# Altium PCB StepMotor_pcb.PcbDoc (part 1 of 2)
Units mm, origin at the board's own origin, x right, y up, seen from the top; angles counter-clockwise.
Board outline 118.92 x 65.15 mm, 2 copper layers (Top Layer, Bottom Layer); 184 components, 60 nets, 864 pads, 72 vias.
Unrouted connection lines stored in the file: 2.
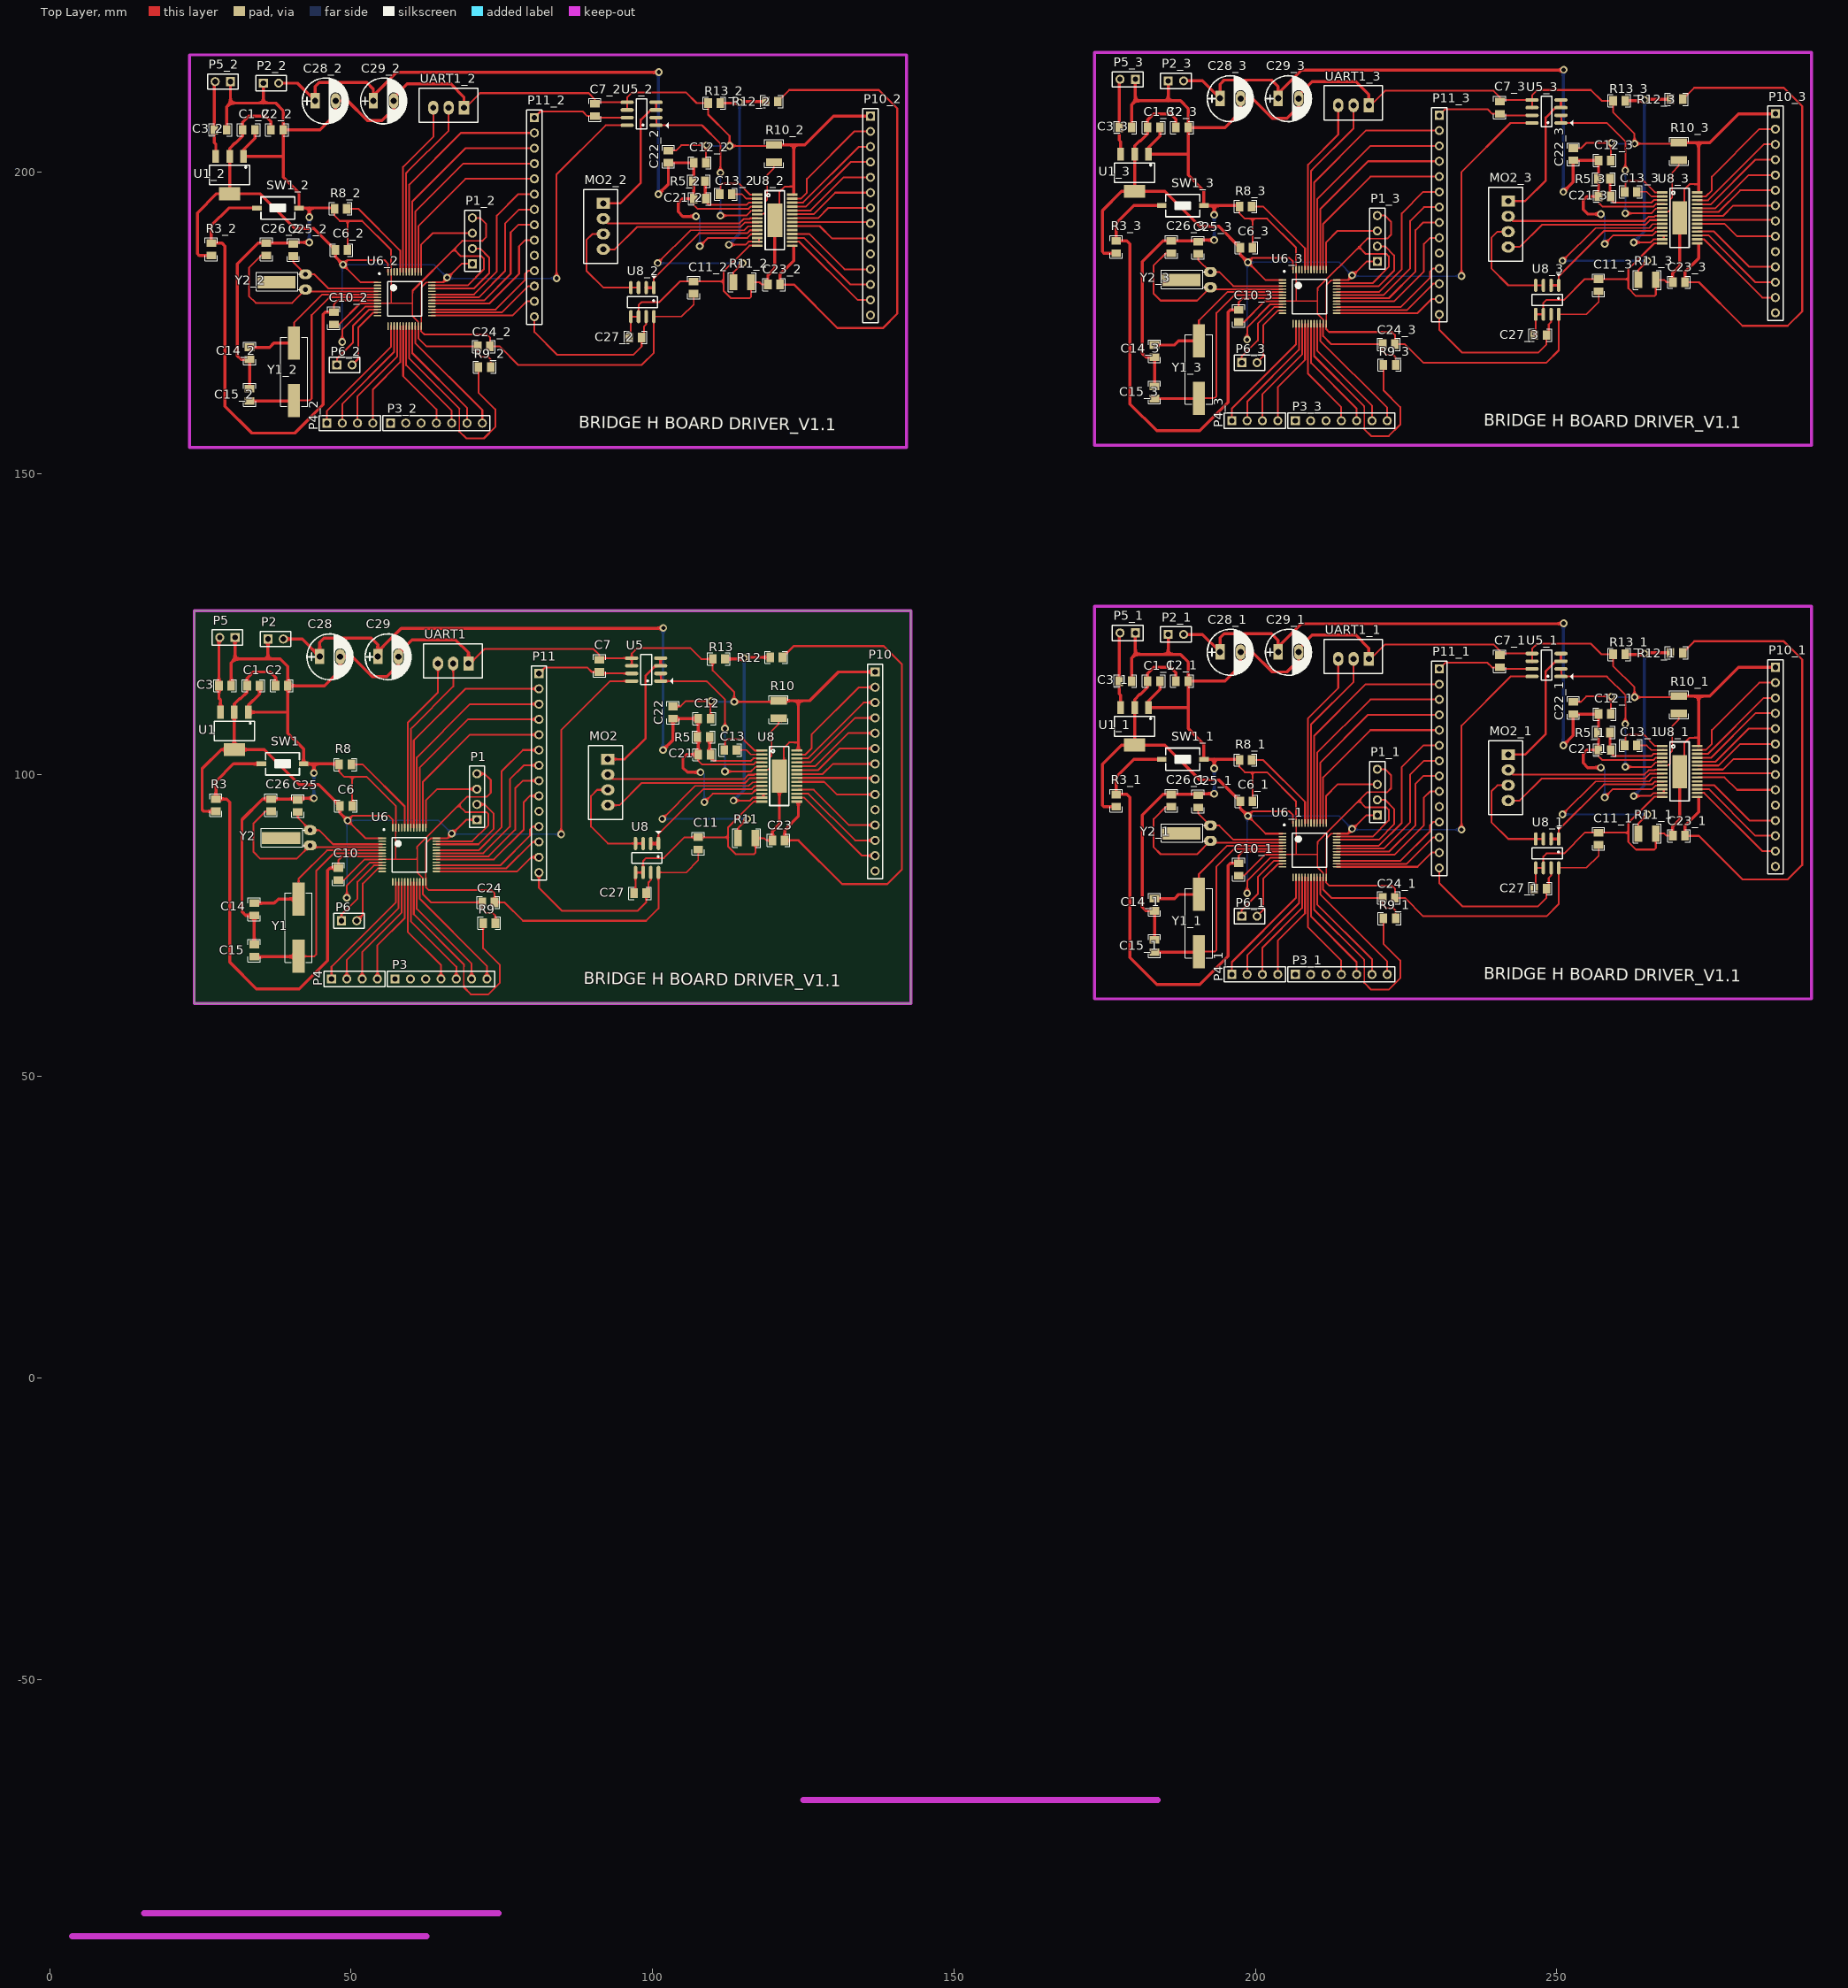
[diagram p0: Top Layer view]
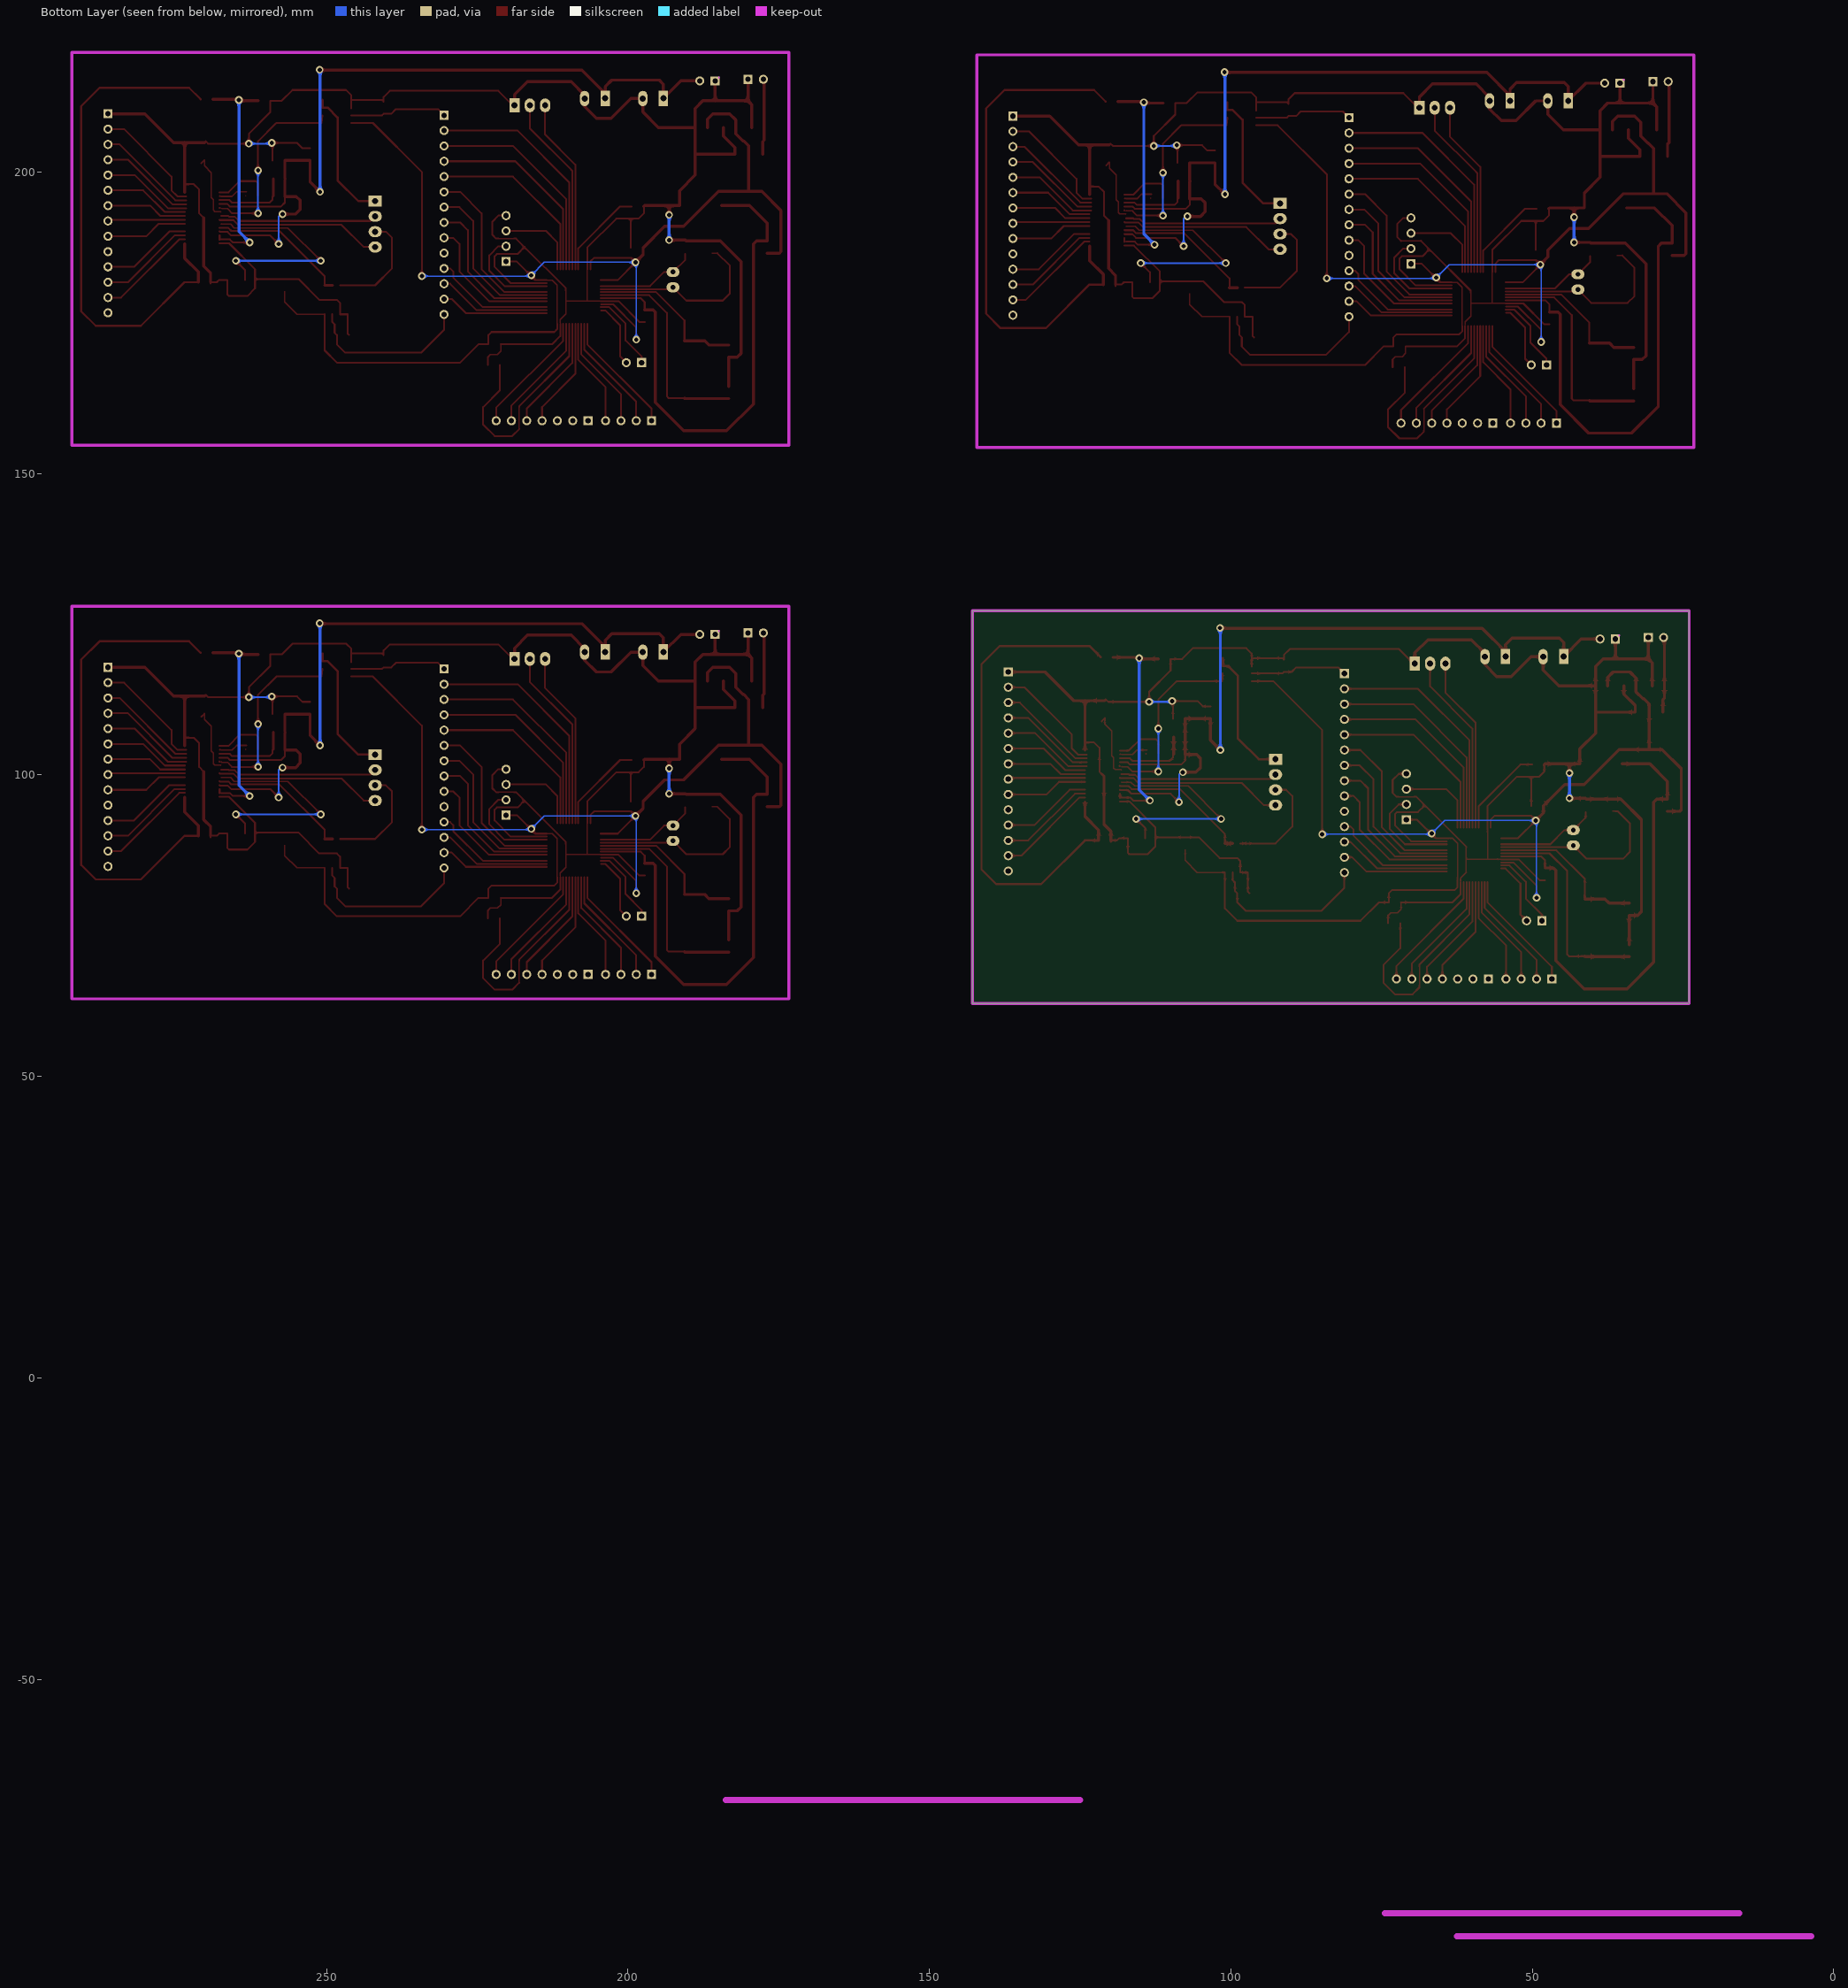
[diagram p1: Bottom Layer view, seen from below]

## Layer stack, top to bottom
Top Solder: solder mask 0.0102, Solder Resist, Dk 3.5
Top Layer: signal copper 0.0356
Dielectric1: dielectric 0.32, FR-4, Dk 4.8
Bottom Layer: signal copper 0.0356
Bottom Solder: solder mask 0.0102, Solder Resist, Dk 3.5

## Board outline
23.957,62.103 23.957,127.249 142.875,127.249 142.875,62.103

## Design rules (kind name [scope] priority, off if disabled: settings)
Clearance [All] p1: gap=0.254 ignorepadtopadclearanceinfootprint=FALSE except(0: Arc-Hole Track-Hole SMDPad-Hole THPad-Hole Via-Hole Fill-Hole Poly-Hole Region-Hole Text-Hole)
PolygonConnect [All] p1: connectstyle=Relief reliefconductorwidth=0.254 reliefentries=4 polygonreliefangle="90 Angle" airgapwidth=0.254
RoutingVias [All] p1: holewidth=0.711 width=1.27 viastyle="Through Hole" minholewidth=0.711 minwidth=1.27 maxholewidth=0.711 maxwidth=1.27
SolderMaskExpansion [All] p1: expansion=0.102
Width [All] p1: maxlimit=0.7 minlimit=0.2 preferedwidth=0.5
30 further rules are at their usual default settings.

## Classes and differential pairs
component class Stepmotor_schematic: C1 C2 C3 C6 C7 C10 C11 C12 C13 C14 C15 C21 C22 C23 C24 C25 C26 C27 C28 C29 MO2 P1 P2 P3 P4 P5 P10 P11 R3 R5 R8 R9 R10 R11 R12 R13 SW1 U1 U5 U6 U8 UART1 Y1 Y2

## Components (designator, comment, footprint, x,y, rotation, side; value= is the part's Value field where it differs from the comment)
C1 "105" 0805_HV 33.782,114.808 r180 top value=103
C1_1 "105" 0805_HV 183.134,115.57 r180 top value=103 (schematic designator C1)
C1_2 "105" 0805_HV 33.02,207.01 r180 top value=103 (schematic designator C1)
C1_3 "105" 0805_HV 183.134,207.391 r180 top value=103 (schematic designator C1)
C2 "105" 0805_HV 38.481,114.808 r180 top value=103
C2_1 "105" 0805_HV 187.833,115.57 r180 top value=103 (schematic designator C2)
C2_2 "105" 0805_HV 37.719,207.01 r180 top value=103 (schematic designator C2)
C2_3 "105" 0805_HV 187.833,207.391 r180 top value=103 (schematic designator C2)
C3 "105" 0805_HV 29.083,114.808 r180 top value=103
C3_1 "105" 0805_HV 178.435,115.57 r180 top value=103 (schematic designator C3)
C3_2 "105" 0805_HV 28.321,207.01 r180 top value=103 (schematic designator C3)
C3_3 "105" 0805_HV 178.435,207.391 r180 top value=103 (schematic designator C3)
C6 "104" 0805_HV 49.149,94.869 r180 top
C6_1 "104" 0805_HV 198.501,95.631 r180 top (schematic designator C6)
C6_2 "104" 0805_HV 48.387,187.071 r180 top (schematic designator C6)
C6_3 "104" 0805_HV 198.501,187.452 r180 top (schematic designator C6)
C7 "104" 0805_HV 91.186,118.11 r270 top
C7_1 "104" 0805_HV 240.538,118.872 r270 top (schematic designator C7)
C7_2 "104" 0805_HV 90.424,210.312 r270 top (schematic designator C7)
C7_3 "104" 0805_HV 240.538,210.693 r270 top (schematic designator C7)
C10 "104" 0805_HV 47.879,83.566 r90 top
C10_1 "104" 0805_HV 197.231,84.328 r90 top (schematic designator C10)
C10_2 "104" 0805_HV 47.117,175.768 r90 top (schematic designator C10)
C10_3 "104" 0805_HV 197.231,176.149 r90 top (schematic designator C10)
C11 "104" 0805_HV 107.569,88.646 r270 top
C11_1 "104" 0805_HV 256.921,89.408 r270 top (schematic designator C11)
C11_2 "104" 0805_HV 106.807,180.848 r270 top (schematic designator C11)
C11_3 "104" 0805_HV 256.921,181.229 r270 top (schematic designator C11)
C12 "103" 0805_HV 108.585,109.347 r180 top
C12_1 "103" 0805_HV 257.937,110.109 r180 top (schematic designator C12)
C12_2 "103" 0805_HV 107.823,201.549 r180 top (schematic designator C12)
C12_3 "103" 0805_HV 257.937,201.93 r180 top (schematic designator C12)
C13 "103" 0805_HV 112.903,104.14 r180 top
C13_1 "103" 0805_HV 262.255,104.902 r180 top (schematic designator C13)
C13_2 "103" 0805_HV 112.141,196.342 r180 top (schematic designator C13)
C13_3 "103" 0805_HV 262.255,196.723 r180 top (schematic designator C13)
C14 "22p" 0805_HV 33.909,77.724 r90 top value=103
C14_1 "22p" 0805_HV 183.261,78.486 r90 top value=103 (schematic designator C14)
C14_2 "22p" 0805_HV 33.147,169.926 r90 top value=103 (schematic designator C14)
C14_3 "22p" 0805_HV 183.261,170.307 r90 top value=103 (schematic designator C14)
C15 "22p" 0805_HV 33.909,70.866 r270 top value=103
C15_1 "22p" 0805_HV 183.261,71.628 r270 top value=103 (schematic designator C15)
C15_2 "22p" 0805_HV 33.147,163.068 r270 top value=103 (schematic designator C15)
C15_3 "22p" 0805_HV 183.261,163.449 r270 top value=103 (schematic designator C15)
C21 "0.1uF" 0805_HV 108.585,103.378 r180 top
C21_1 "0.1uF" 0805_HV 257.937,104.14 r180 top (schematic designator C21)
C21_2 "0.1uF" 0805_HV 107.823,195.58 r180 top (schematic designator C21)
C21_3 "0.1uF" 0805_HV 257.937,195.961 r180 top (schematic designator C21)
C22 "103" 0805_HV 103.378,110.363 r270 top
C22_1 "103" 0805_HV 252.73,111.125 r270 top (schematic designator C22)
C22_2 "103" 0805_HV 102.616,202.565 r270 top (schematic designator C22)
C22_3 "103" 0805_HV 252.73,202.946 r270 top (schematic designator C22)
C23 "0.47uF" 0805_HV 120.904,89.154 r0 top
C23_1 "0.47uF" 0805_HV 270.256,89.916 r0 top (schematic designator C23)
C23_2 "0.47uF" 0805_HV 120.142,181.356 r0 top (schematic designator C23)
C23_3 "0.47uF" 0805_HV 270.256,181.737 r0 top (schematic designator C23)
C24 "104" 0805_HV 72.771,78.867 r0 top
C24_1 "104" 0805_HV 222.123,79.629 r0 top (schematic designator C24)
C24_2 "104" 0805_HV 72.009,171.069 r0 top (schematic designator C24)
C24_3 "104" 0805_HV 222.123,171.45 r0 top (schematic designator C24)
C25 "12p" 0805_HV 41.148,94.869 r270 top value=103
C25_1 "12p" 0805_HV 190.5,95.631 r270 top value=103 (schematic designator C25)
C25_2 "12p" 0805_HV 40.386,187.071 r270 top value=103 (schematic designator C25)
C25_3 "12p" 0805_HV 190.5,187.452 r270 top value=103 (schematic designator C25)
C26 "12p" 0805_HV 36.703,94.996 r270 top value=103
C26_1 "12p" 0805_HV 186.055,95.758 r270 top value=103 (schematic designator C26)
C26_2 "12p" 0805_HV 35.941,187.198 r270 top value=103 (schematic designator C26)
C26_3 "12p" 0805_HV 186.055,187.579 r270 top value=103 (schematic designator C26)
C27 "104" 0805_HV 97.917,80.391 r0 top
C27_1 "104" 0805_HV 247.269,81.153 r0 top (schematic designator C27)
C27_2 "104" 0805_HV 97.155,172.593 r0 top (schematic designator C27)
C27_3 "104" 0805_HV 247.269,172.974 r0 top (schematic designator C27)
C28 "390uF" CP1/3.0 46.482,119.634 r0 top
C28_1 "390uF" CP1/3.0 195.834,120.396 r0 top (schematic designator C28)
C28_2 "390uF" CP1/3.0 45.72,211.836 r0 top (schematic designator C28)
C28_3 "390uF" CP1/3.0 195.834,212.217 r0 top (schematic designator C28)
C29 "390uF" CP1/3.0 56.134,119.634 r0 top
C29_1 "390uF" CP1/3.0 205.486,120.396 r0 top (schematic designator C29)
C29_2 "390uF" CP1/3.0 55.372,211.836 r0 top (schematic designator C29)
C29_3 "390uF" CP1/3.0 205.486,212.217 r0 top (schematic designator C29)
MO2 "Header 4_MH" "HEADER 4" 92.583,98.806 r270 top
MO2_1 "Header 4_MH" "HEADER 4" 241.935,99.568 r270 top (schematic designator MO2)
MO2_2 "Header 4_MH" "HEADER 4" 91.821,191.008 r270 top (schematic designator MO2)
MO2_3 "Header 4_MH" "HEADER 4" 241.935,191.389 r270 top (schematic designator MO2)
P1 "PRO01" HDR1X4 70.866,92.583 r90 top
P1_1 "PRO01" HDR1X4 220.218,93.345 r90 top (schematic designator P1)
P1_2 "PRO01" HDR1X4 70.104,184.785 r90 top (schematic designator P1)
P1_3 "PRO01" HDR1X4 220.218,185.166 r90 top (schematic designator P1)
P2 "Power" HDR1X2 36.195,122.555 r0 top
P2_1 "Power" HDR1X2 185.547,123.317 r0 top (schematic designator P2)
P2_2 "Power" HDR1X2 35.433,214.757 r0 top (schematic designator P2)
P2_3 "Power" HDR1X2 185.547,215.138 r0 top (schematic designator P2)
P3 "GPIO" HDR1X7 57.277,66.167 r0 top
P3_1 "GPIO" HDR1X7 206.629,66.929 r0 top (schematic designator P3)
P3_2 "GPIO" HDR1X7 56.515,158.369 r0 top (schematic designator P3)
P3_3 "GPIO" HDR1X7 206.629,158.75 r0 top (schematic designator P3)
P4 "Encoder" HDR1X4 46.736,66.167 r0 top
P4_1 "Encoder" HDR1X4 196.088,66.929 r0 top (schematic designator P4)
P4_2 "Encoder" HDR1X4 45.974,158.369 r0 top (schematic designator P4)
P4_3 "Encoder" HDR1X4 196.088,158.75 r0 top (schematic designator P4)
P5 "Power" HDR1X2 30.734,122.809 r180 top
P5_1 "Power" HDR1X2 180.086,123.571 r180 top (schematic designator P5)
P5_2 "Power" HDR1X2 29.972,215.011 r180 top (schematic designator P5)
P5_3 "Power" HDR1X2 180.086,215.392 r180 top (schematic designator P5)
P6 "Power" HDR1X2 48.387,75.819 r0 top (schematic designator P2)
P6_1 "Power" HDR1X2 197.739,76.581 r0 top (schematic designator P2)
P6_2 "Power" HDR1X2 47.625,168.021 r0 top (schematic designator P2)
P6_3 "Power" HDR1X2 197.739,168.402 r0 top (schematic designator P2)
P10 "H1" HDR1X14 136.906,117.094 r270 top
P10_1 "H1" HDR1X14 286.258,117.856 r270 top (schematic designator P10)
P10_2 "H1" HDR1X14 136.144,209.296 r270 top (schematic designator P10)
P10_3 "H1" HDR1X14 286.258,209.677 r270 top (schematic designator P10)
P11 "MCU" HDR1X14 81.153,116.84 r270 top
P11_1 "MCU" HDR1X14 230.505,117.602 r270 top (schematic designator P11)
P11_2 "MCU" HDR1X14 80.391,209.042 r270 top (schematic designator P11)
P11_3 "MCU" HDR1X14 230.505,209.423 r270 top (schematic designator P11)
R3 "10K" 0805_HV 27.559,94.996 r270 top
R3_1 "10K" 0805_HV 176.911,95.758 r270 top (schematic designator R3)
R3_2 "10K" 0805_HV 26.797,187.198 r270 top (schematic designator R3)
R3_3 "10K" 0805_HV 176.911,187.579 r270 top (schematic designator R3)
R5 "1M" 0805_HV 108.458,106.299 r180 top
R5_1 "1M" 0805_HV 257.81,107.061 r180 top (schematic designator R5)
R5_2 "1M" 0805_HV 107.696,198.501 r180 top (schematic designator R5)
R5_3 "1M" 0805_HV 257.81,198.882 r180 top (schematic designator R5)
R8 "100K" 0805_HV 49.022,101.727 r0 top
R8_1 "100K" 0805_HV 198.374,102.489 r0 top (schematic designator R8)
R8_2 "100K" 0805_HV 48.26,193.929 r0 top (schematic designator R8)
R8_3 "100K" 0805_HV 198.374,194.31 r0 top (schematic designator R8)
R9 "100K" 0805_HV 72.898,75.438 r0 top
R9_1 "100K" 0805_HV 222.25,76.2 r0 top (schematic designator R9)
R9_2 "100K" 0805_HV 72.136,167.64 r0 top (schematic designator R9)
R9_3 "100K" 0805_HV 222.25,168.021 r0 top (schematic designator R9)
R10 "RT0603DRE07140KL" 1210 120.904,110.871 r90 top value=140k
R10_1 "RT0603DRE07140KL" 1210 270.256,111.633 r90 top value=140k (schematic designator R10)
R10_2 "RT0603DRE07140KL" 1210 120.142,203.073 r90 top value=140k (schematic designator R10)
R10_3 "RT0603DRE07140KL" 1210 270.256,203.454 r90 top value=140k (schematic designator R10)
R11 "RT0603DRE07140KL" 1210 115.623,89.535 r0 top value=140k
R11_1 "RT0603DRE07140KL" 1210 264.975,90.297 r0 top value=140k (schematic designator R11)
R11_2 "RT0603DRE07140KL" 1210 114.861,181.737 r0 top value=140k (schematic designator R11)
R11_3 "RT0603DRE07140KL" 1210 264.975,182.118 r0 top value=140k (schematic designator R11)
R12 "50K" 0805_HV 120.523,119.507 r0 top
R12_1 "50K" 0805_HV 269.875,120.269 r0 top (schematic designator R12)
R12_2 "50K" 0805_HV 119.761,211.709 r0 top (schematic designator R12)
R12_3 "50K" 0805_HV 269.875,212.09 r0 top (schematic designator R12)
R13 "30K" 0805_HV 110.998,119.253 r0 top
R13_1 "30K" 0805_HV 260.35,120.015 r0 top (schematic designator R13)
R13_2 "30K" 0805_HV 110.236,211.455 r0 top (schematic designator R13)
R13_3 "30K" 0805_HV 260.35,211.836 r0 top (schematic designator R13)
SW1 "SW" "BUTTON SMD 2" 38.608,101.854 r180 top
SW1_1 "SW" "BUTTON SMD 2" 187.96,102.616 r180 top (schematic designator SW1)
SW1_2 "SW" "BUTTON SMD 2" 37.846,194.056 r180 top (schematic designator SW1)
SW1_3 "SW" "BUTTON SMD 2" 187.96,194.437 r180 top (schematic designator SW1)
U1 "AMS1117-3.3V SOT223 _MH" SOT223 30.607,107.315 r180 top
U1_1 "AMS1117-3.3V SOT223 _MH" SOT223 179.959,108.077 r180 top (schematic designator U1)
U1_2 "AMS1117-3.3V SOT223 _MH" SOT223 29.845,199.517 r180 top (schematic designator U1)
U1_3 "AMS1117-3.3V SOT223 _MH" SOT223 179.959,199.898 r180 top (schematic designator U1)
U5 "ACS722LLCTR-05AB-T" SO-8 98.933,117.475 r180 top
U5_1 "ACS722LLCTR-05AB-T" SO-8 248.285,118.237 r180 top (schematic designator U5)
U5_2 "ACS722LLCTR-05AB-T" SO-8 98.171,209.677 r180 top (schematic designator U5)
U5_3 "ACS722LLCTR-05AB-T" SO-8 248.285,210.058 r180 top (schematic designator U5)
U6 "STM32F103C8T6 LQFP48 _MH" LQFP48 59.662,86.736 r0 top
U6_1 "STM32F103C8T6 LQFP48 _MH" LQFP48 209.014,87.498 r0 top (schematic designator U6)
U6_2 "STM32F103C8T6 LQFP48 _MH" LQFP48 58.9,178.938 r0 top (schematic designator U6)
U6_3 "STM32F103C8T6 LQFP48 _MH" LQFP48 209.014,179.319 r0 top (schematic designator U6)
U8 "DRV8841PWPR" TSSOP-28EP 121.031,99.822 r0 top
U8 "ACS722LLCTR-05AB-T" SO-8 99.06,86.233 r270 top
U8_1 "ACS722LLCTR-05AB-T" SO-8 248.412,86.995 r270 top (schematic designator U8)
U8_1 "DRV8841PWPR" TSSOP-28EP 270.383,100.584 r0 top (schematic designator U8)
U8_2 "ACS722LLCTR-05AB-T" SO-8 98.298,178.435 r270 top (schematic designator U8)
U8_2 "DRV8841PWPR" TSSOP-28EP 120.269,192.024 r0 top (schematic designator U8)
U8_3 "ACS722LLCTR-05AB-T" SO-8 248.412,178.816 r270 top (schematic designator U8)
U8_3 "DRV8841PWPR" TSSOP-28EP 270.383,192.405 r0 top (schematic designator U8)
UART1 "Header 3_MH" "HEADER 3" 66.929,118.491 r180 top
UART1_1 "Header 3_MH" "HEADER 3" 216.281,119.253 r180 top (schematic designator UART1)
UART1_2 "Header 3_MH" "HEADER 3" 66.167,210.693 r180 top (schematic designator UART1)
UART1_3 "Header 3_MH" "HEADER 3" 216.281,211.074 r180 top (schematic designator UART1)
Y1 "8MHZ" "XTAL 49S SMD" 41.275,74.676 r90 top
Y1_1 "8MHZ" "XTAL 49S SMD" 190.627,75.438 r90 top (schematic designator Y1)
Y1_2 "8MHZ" "XTAL 49S SMD" 40.513,166.878 r90 top (schematic designator Y1)
Y1_3 "8MHZ" "XTAL 49S SMD" 190.627,167.259 r90 top (schematic designator Y1)
Y2 "32.768KHZ" XT32kn 43.18,90.856 r180 top
Y2_1 "32.768KHZ" XT32kn 192.532,91.618 r180 top (schematic designator Y2)
Y2_2 "32.768KHZ" XT32kn 42.418,183.058 r180 top (schematic designator Y2)
Y2_3 "32.768KHZ" XT32kn 192.532,183.439 r180 top (schematic designator Y2)

## Footprints (in the part's own frame and the unit in brackets; to place one, negate y for a bottom-side part, rotate by r counter-clockwise, add the part's x,y. Pads: shape width x height; smd on the part's side, far side on the other; paste and mask are expansions set on the pad)
0805_HV [mil] "0805 with 30mil clearance between pads"
  rect 50x63 smd: 1(-40,0) 2(40,0)
  silkscreen extent -74,-40 74,40, body extent -43,-29 43,29, height 57
1210 [mm] "1210 from SM-752 data"
  rect 1.3x2.7 smd: 1(1.45,0) 2(-1.45,0)
  silkscreen extent -2.32,-1.57 2.32,1.57, body extent -1.7,-1.35 1.7,1.35, height 1.35
"BUTTON SMD 2" [mm]
  rect 1.6x0.8 smd: 1(-3.5,0) 2(3.5,0)
  silkscreen extent -2.82,-1.85 2.82,1.85, body extent -3.05,-1.85 3.05,1.85, height 2.5
CP1/3.0 [mil]
  rect 60x100 hole 40: 1(-67,0.5)
  oval 60x100 hole 40: 2(67,-0.5)
  silkscreen extent -150,-151 150,148, body extent -156,-161 159,154, height 453
HDR1X2 [mm] "Connector; Header; 2 Position"
  rect 1.5x1.5 hole 0.9: 1(0,0)
  round 1.5 hole 0.9: 2(2.54,0)
  silkscreen extent -1.27,-1.27 3.81,1.27
HDR1X4 [mm] "Connector; Header; 4 Position"
  rect 1.5x1.5 hole 0.9: 1(0,0)
  round 1.5 hole 0.9: 2(2.54,0) 3(5.08,0) 4(7.62,0)
  silkscreen extent -1.27,-1.27 8.89,1.27
HDR1X7 [mm] "Connector; Header; 7 Position"
  rect 1.5x1.5 hole 0.9: 1(0,0)
  round 1.5 hole 0.9: 2(2.54,0) 3(5.08,0) 4(7.62,0) 5(10.16,0) 6(12.7,0) 7(15.24,0)
  silkscreen extent -1.27,-1.27 16.51,1.27
HDR1X14 [mm] "Connector; Header; 14 Position"
  rect 1.5x1.5 hole 0.9: 1(0,0)
  round 1.5 hole 0.9: 2(2.54,0) 3(5.08,0) 4(7.62,0) 5(10.16,0) 6(12.7,0) 7(15.24,0) 8(17.78,0) 9(20.32,0) 10(22.86,0) 11(25.4,0) 12(27.94,0) 13(30.48,0) 14(33.02,0)
  silkscreen extent -1.27,-1.27 34.29,1.27
"HEADER 3" [mm]
  rect 1.7x2.3 hole 1 paste+0: 1(-2.54,0)
  oval 1.7x2.3 hole 1 paste+0: 2(0,0) 3(2.54,0)
  silkscreen extent -4.83,-3.25 4.9,2.41
"HEADER 4" [mm]
  rect 1.8x2.2 hole 1: 1(-3.81,0)
  oval 1.8x2.2 hole 1: 2(-1.27,0) 3(1.27,0) 4(3.81,0)
  silkscreen extent -6.1,-3.25 6.17,2.41
LQFP48 [mm]
  rect 1.27x0.25 smd: 1(-4.524,2.775)
  oval 1.27x0.25 smd: 2(-4.524,2.275) 3(-4.524,1.775) 4(-4.524,1.275) 5(-4.524,0.775) 6(-4.524,0.275) 7(-4.524,-0.225) 8(-4.524,-0.725) 9(-4.524,-1.225) 10(-4.524,-1.725) 11(-4.524,-2.225) 12(-4.524,-2.725) 25(4.473,-2.725) 26(4.473,-2.225) 27(4.473,-1.725) 28(4.473,-1.225) 29(4.473,-0.725) 30(4.473,-0.225) 31(4.473,0.275) 32(4.473,0.775) 33(4.473,1.275) 34(4.473,1.775) 35(4.473,2.275) 36(4.473,2.775)
  oval 0.25x1.27 smd: 13(-2.775,-4.473) 14(-2.275,-4.473) 15(-1.775,-4.473) 16(-1.275,-4.473) 17(-0.775,-4.473) 18(-0.275,-4.473) 19(0.225,-4.473) 20(0.725,-4.473) 21(1.225,-4.473) 22(1.725,-4.473) 23(2.225,-4.473) 24(2.725,-4.473) 37(2.725,4.524) 38(2.225,4.524) 39(1.725,4.524) 40(1.225,4.524) 41(0.725,4.524) 42(0.225,4.524) 43(-0.275,4.524) 44(-0.775,4.524) 45(-1.275,4.524) 46(-1.775,4.524) 47(-2.275,4.524) 48(-2.775,4.524)
  silkscreen extent -4.35,-2.82 2.82,4.35, body extent -4.53,-4.47 4.47,4.53, height 1.5
SO-8 [mm] "8-Pin Small Outline Integrated Circuit 1.27 mm Pitch, IPC Medium Density"
  oval 2.2x0.6 smd: 1(-2.4,1.905) 2(-2.4,0.635) 3(-2.4,-0.635) 4(-2.4,-1.905) 5(2.4,-1.905) 6(2.4,-0.635) 7(2.4,0.635) 8(2.4,1.905)
  silkscreen extent -4.44,-2.5 0.9,2.5, body extent -2.93,-2.51 3.08,2.49, height 1.75
SOT223 [mm] "SOT-223/SC-73; 4 Leads; Body 6.7 x 7.3 mm, inc. leads (LxW max)"
  rect 1.1x2.15 smd: 1(-2.3,-3.1) 2(0,-3.1) 3(2.3,-3.1)
  rect 3.5x2.15 smd: 4(0,3.1)
  silkscreen extent -3.35,-1.62 3.35,1.62, body extent -3.43,-1.65 3.43,1.65, height 2.54
TSSOP-28EP [mil]
  rect 71x16 smd: 1(-114,166.5) 2(-114,140.5) 3(-114,115.5) 4(-114,89.5) 5(-114,63.5) 6(-114,38.5) 7(-114,12.5) 8(-114,-12.5) 9(-114,-38.5) 10(-114,-64.5) 11(-114,-89.5) 12(-114,-115.5) 13(-114,-140.5) 14(-114,-166.5) 15(114,-166.5) 16(114,-140.5) 17(114,-115.5) 18(114,-89.5) 19(114,-64.5) 20(114,-38.5) 21(114,-12.5) 22(114,12.5) 23(114,38.5) 24(114,63.5) 25(114,89.5) 26(114,115.5) 27(114,140.5) 28(114,166.5)
  rect 98x217 smd: 29(0,-0.5)
  silkscreen extent -63,-193 63,194, body extent -126,-191 126,191, height 46
XT32kn [mil] "Crystal for 32,768kHz, 2pin"
  oval 85x65 hole 31: 1(0,0) 2(0,100)
  rect 250x80 smd: 3(190,52)
  silkscreen extent 34,-12 320,109, body extent -7,-5 343,107, height 79
"XTAL 49S SMD" [mm]
  rect 5.5x2 smd: 1(-4.75,0) 2(4.75,0)
  silkscreen extent -5.75,-2.25 5.75,2.25, body extent -6.15,-2.35 6.15,2.35, height 4.31

## Part data
C1 C1_1 C1_2 C1_3 C2 C2_1 C2_2 C2_3 C3 C3_1 C3_2 C3_3 C14 C14_1 C14_2 C14_3 C15 C15_1 C15_2 C15_3 C25 C25_1 C25_2 C25_3 C26 C26_1 C26_2 C26_3: library part CM, "Cap SMD"
C6 C6_1 C6_2 C6_3 C7 C7_1 C7_2 C7_3 C10 C10_1 C10_2 C10_3 C11 C11_1 C11_2 C11_3 C12 C12_1 C12_2 C12_3 C13 C13_1 C13_2 C13_3 C21 C21_1 C21_2 C21_3 C22 C22_1 C22_2 C22_3 C23 C23_1 C23_2 C23_3 C24 C24_1 C24_2 C24_3 C27 C27_1 C27_2 C27_3: library part "Capacitor 0805", "Ceramic Chip Capacitor - Standard", PackageDocument=Mar-2001, Code_IPC=2012[0805], Code_JEITA=0805, ComponentLink1Description="Manufacturer Link", ComponentLink1URL=http://www.kemet.com/, ComponentLink2Description=Datasheet, ComponentLink2URL=http://www.kemet.com/kemet/web/homepage/kechome.nsf/vapubfilesname/F3102TA.pdf/$file/F3102TA.pdf, DatasheetDocument=Mar-2001, LatestRevisionDate=19-Mar-2004, LatestRevisionNote="Silkscreen size reduced.", Note="Footprint corresponds to dimensions for bulk cassette packaging. This case size has tightened tolerances.", PackageReference=0805, Published=17-Jul-2002, Publisher="Altium Limited"
C28 C28_1 C28_2 C28_3 C29 C29_1 C29_2 C29_3: library part "Capacitor TuHoa", Cap_Case=10x22, Manufacturer=Nichicon, PartNumber=UHW1H391MPD6, Supplier Part Number 1=493-6885-ND, Tolerance_%=20, Value1=Unknown, Value2=50V, AEC Category=Q200, AEC Grade=N/A, AEC Qualified=N, Cap_F=0.000390, ComponentLink1Description="Datasheet link", ComponentLink1URL=http://nichicon-us.com/english/products/pdfs/e-uhw.pdf, CompType=Capacitor, LatestRevisionDate=2015-12-17, MountType=TH, PackageReference=10x22, Polarized=Y, Publisher="Texas Instruments", RoHS=Y, Series=ZL, Supplier 1=Digi-Key, SymbolVersion=2008-07-09, TaMax_C=105, TaMin_C=-40, Technology=AL, U/M=EA, ValueDisplayed=390uF, VDC_V=50
MO2 MO2_1 MO2_2 MO2_3: "Header 4P XH2.54 th?ng"
P1 P1_1 P1_2 P1_3 P4 P4_1 P4_2 P4_3: library part "Header 4", "Header, 4-Pin", LatestRevisionDate=17-Jul-2002, LatestRevisionNote="Re-released for DXP Platform.", Publisher="Altium Limited"
P2 P2_1 P2_2 P2_3 P5 P5_1 P5_2 P5_3 P6 P6_1 P6_2 P6_3: library part "Header 2", "Header, 2-Pin", LatestRevisionDate=17-Jul-2002, LatestRevisionNote="Re-released for DXP Platform.", Publisher="Altium Limited"
P3 P3_1 P3_2 P3_3: library part "Header 7H", "Header, 7-Pin, Right Angle", LatestRevisionDate=17-Jul-2002, LatestRevisionNote="Re-released for DXP Platform.", Publisher="Altium Limited"
P10 P10_1 P10_2 P10_3 P11 P11_1 P11_2 P11_3: library part "Header 14", "Header, 14-Pin", LatestRevisionDate=17-Jul-2002, LatestRevisionNote="Re-released for DXP Platform.", Publisher="Altium Limited"
R3 R3_1 R3_2 R3_3 R5 R5_1 R5_2 R5_3 R8 R8_1 R8_2 R8_3 R9 R9_1 R9_2 R9_3 R12 R12_1 R12_2 R12_3 R13 R13_1 R13_2 R13_3: library part "R nho", "RES, 100, 1%, 0.1 W, 0402", Manufacturer=Panasonic, PartNumber=ERJ-2RKF1000X, Power_W=0.1, Supplier Part Number 1=P100LCT-ND, TempCo="100 ppm/C", Tolerance_%=1, Value1=1%, Value2=0.1W, Value_Code=100R, AEC Category=Q200, AEC Qualified=?, ComponentLink1Description="Datasheet link", ComponentLink1URL=http://industrial.panasonic.com/www-data/pdf/AOA0000/AOA0000CE2.pdf, CompType=Resistor, EIA_Code=E96, LatestRevisionDate=2016-01-08, MountType=SMT, PackageReference=0402, Published=2008-06-26, Publisher="Texas Instruments", Res_ohm=100, RoHS=Y, Supplier 1=Digi-Key, Supplier 2=Mouser, Supplier 3=Farnell, Supplier Part Number 2=667-ERJ-2RKF1000X, Supplier Part Number 3=2304034, SymbolVersion=2009-05-29, Technology="Thick Film", U/M=EA, VDC_V=50
R10 R10_1 R10_2 R10_3 R11 R11_1 R11_2 R11_3: "RES, 140 k, 0.5%, 0.1 W, 0603", Manufacturer="Yageo America", Power_W=0.1, TempCo="50 ppm/C", Tolerance_%=0.5, Value1=0.5%, Value2=0.1W, Value_Code=140k, ValueDisplayed=200mR, ComponentLink1Description="Datasheet link", ComponentLink1URL=http://www.yageo.com/pdf/PYu-RT_1-to-0.05_RoHS_L_3.pdf, CompType=Resistor, EIA_Code=E192, LatestRevisionDate=2014-09-19, MountType=SMT, PackageReference=0603, PartNumber=RT0603DRE07140KL, Published=2008-06-26, Publisher="Texas Instruments", Res_ohm=140000, RoHS=Y, SymbolVersion=2009-05-29, Technology="Thin Film", U/M=EA, VDC_V=75
SW1 SW1_1 SW1_2 SW1_3: library part "BUTTON 2P SMD_MH", "Nút nh?n 2 chân, dán"
U5 U5_1 U5_2 U5_3 U8 U8_1 U8_2 U8_3: library part ACS712
U8 U8_1 U8_2 U8_3: BOM_LCSC Assembly=Yes, BOM_Manufacturer=TI, BOM_Manufacturer Part=DRV8841PWPR, BOM_Supplier=LCSC, BOM_Supplier Part=C36542, image=//image.lceda.cn/szlcsc/C36542.jpg, SMT Type=Extend, spicePre=U
UART1 UART1_1 UART1_2 UART1_3: "Header 3P XH2.54 th?ng"
Y1 Y1_1 Y1_2 Y1_3 Y2 Y2_1 Y2_2 Y2_3: library part "CRYSTAL_49S DIP_MH", "Crystal Oscillator", LatestRevisionDate=17-Jul-2002, LatestRevisionNote="Re-released for DXP Platform.", PackageReference=R38, Published=8-Jun-2000, Publisher="Altium Limited"

## Via types
v1: diameter 1.27, hole 0.711, Top Layer to Bottom Layer, 72 vias

## Nets (pads, with @x,y where several pads share a name; then routed paths per layer and width w, separated by ;. In a path a pad name is that pad's centre, name@x,y a point inside that pad or via, vN(x,y) a via of type N, cw(c..) or ccw(c..) an arc to the next point about the centre after c; other vN are vias at no path point)
5V: C3.2 P5.2 U1.3 | length 12.5
  Top Layer w0.5: P5.2@28.067,122.809 C3.2@28.067,114.808 28.067,112.711 28.307,112.471 U1.3@28.307,110.415
AI0: P11.2 U6.41 | length 38.8
  Top Layer w0.3: U6.41@60.387,91.259 60.387,92.23 60.387,105.726 68.961,114.3 P11.2@81.153,114.3
AI0a: P10.5 U8.24 | length 15.3
  Top Layer w0.3: U8.24@123.927,101.435 126.962,101.435 132.461,106.934 P10.5@136.906,106.934
AI1: P11.3 U6.40 | length 35.8
  Top Layer w0.3: U6.40@60.887,91.259 60.887,102.924 69.723,111.76 76.073,111.76 ; 75.819,111.76 P11.3@81.153,111.76
AI1a: P10.4 U8.25 | length 16
  Top Layer w0.3: U8.25@123.927,102.095 126.225,102.095 133.604,109.474 P10.4@136.906,109.474
BI0a: P10.3 U8.26 | length 16.8
  Top Layer w0.3: U8.26@123.927,102.756 125.743,102.756 135.001,112.014 P10.3@136.906,112.014
BI1: P11.4 U6.39 | length 33.1
  Top Layer w0.3: U6.39@61.387,91.259 61.387,101.265 69.342,109.22 75.438,109.22 P11.4@81.153,109.22
BI1a: P10.2 U8.27 | length 18.9
  Top Layer w0.3: U8.27@123.927,103.391 125.362,103.391 126.365,104.394 126.365,106.68 134.239,114.554 P10.2@136.906,114.554
BI2: P11.5 U6.38 | length 30.1
  Top Layer w0.3: U6.38@61.887,91.259 61.887,98.844 69.723,106.68 74.803,106.68 P11.5@81.153,106.68
BOOT0: R8.2 U6.44 | length 15.2
  Top Layer w0.3: R8.2@50.038,101.727 51.943,101.727 58.887,94.783 U6.44@58.887,91.259
BOOT1: R9.1 U6.20 | length 39.2
  Top Layer w0.2: 68.707,64.77 68.707,68.58
  Top Layer w0.3: U6.20@60.387,82.263 60.387,76.9 68.707,68.58 ; 68.707,64.77 69.85,63.627 72.771,63.627 74.676,65.532 74.676,68.453 71.882,71.247 R9.1@71.882,75.438
CLK: P4.2 U6.15 | length 19.7
  Top Layer w0.3: P4.2@49.276,66.167 49.276,69.342 57.887,77.953 U6.15@57.887,82.263
CSN: P4.1 U6.14 | length 20.5
  Top Layer w0.3: P4.1@46.736,66.167 46.736,68.199 57.387,78.85 U6.14@57.387,82.263
GND: C1.1 C2.1 C3.1 C6.1 C7.1 C10.1 C11.1 C12.1 C14.1 C15.1 C22.1 C23.1 C24.1 C25.1 C26.1 C27.1 C28.2 C29.2 P1.4 P2.1 P5.1 P10.1 R8.1 R9.2 R10.1 R11.1 R13.1 SW1.1 U1.1 U5.5 U5.6 U6.8 U6.23 U6.35 U6.47 U8.5@97.155,83.833 U8.6@98.425,83.833 U8.14 U8.28 U8.29 UART1.1 | length 406.6
  Top Layer w0.2: U6.8@55.138,86.011 55.159,86.032 57.404,86.032 ; U6.47@57.387,91.259 57.387,86.049 57.404,86.032 ; 60.96,88.138 60.96,86.106 ; U6.23@61.908,82.767 61.908,82.496 61.866,82.454 61.866,82.971 60.925,83.912 60.96,83.947 60.96,86.106 ; U6.35@64.135,89.011 U6.35@64.139,89.007 ; 69.215,96.393 72.517,96.393 ; C24.1@71.755,78.867 71.755,77.724 72.326,77.153 73.469,77.153 73.914,76.708 ; 57.404,86.032 60.886,86.032 60.96,86.106
  Top Layer w0.3: C10.1@47.879,82.55 48.768,82.55 52.229,86.011 U6.8@55.138,86.011 ; R8.1@48.006,101.727 48.006,100.584 48.895,99.695 50.165,99.695 ; C6.1@50.165,94.869 50.165,99.695 ; U6.47@57.387,91.259 57.387,94.886 52.578,99.695 50.165,99.695 ; 60.96,88.138 67.818,94.996 ; U6.23@61.887,82.263 61.887,80.226 63.246,78.867 C24.1@71.755,78.867 ; U6.35@64.139,89.007 70.084,89.007 72.771,91.694 72.771,93.472 72.39,93.853 68.961,93.853 67.818,94.996 ; 69.215,96.393 67.818,94.996 ; UART1.1@69.469,118.491 69.723,118.491 72.136,120.904 90.17,120.904 91.186,119.888 C7.1@91.186,119.126 91.44,119.38 U5.5@96.533,119.38 ; P1.4@70.866,100.203 72.136,100.203 73.152,99.187 73.152,97.028 72.517,96.393 ; R9.2@73.914,75.438 73.914,76.708 ; U5.6@96.533,117.97 U5.6@96.533,118.11 U5.5@96.533,119.38 ; C27.1@96.901,80.391 97.155,80.645 U8.5@97.155,83.833 U8.6@98.425,83.833 98.425,85.725 98.933,86.233 101.854,86.233 105.283,89.662 C11.1@107.569,89.662 112.522,89.662 ; C22.1@103.378,111.379 104.648,111.379 105.537,112.268 v1(109.728,112.268) 109.601,112.141 C12.1@109.601,109.347 ; U8.14@118.389,95.606 116.815,95.606 112.522,91.313 112.522,89.662 ; C23.1@119.888,88.9 C23.1@119.888,89.154 118.872,89.154 118.491,89.535 R11.1@117.073,89.535 117.073,87.101 116.84,86.868 113.792,86.868 112.522,88.138 112.522,89.662 ; R10.1@120.904,112.321 120.703,112.522 120.322,112.141 v1(113.538,112.141) 113.538,113.792 109.982,117.348 R13.1@109.982,119.253 108.077,119.253 106.299,121.031 97.409,121.031 96.533,120.155 U5.5@96.533,119.38 ; U8.29@121.031,99.809 121.793,100.571 121.793,104.521 122.682,105.41 124.181,105.41
  Top Layer w0.5: C3.1@30.099,114.808 30.099,118.618 30.734,119.253 ; P5.1@30.734,122.809 30.734,119.253 ; C15.1@33.909,71.882 C14.1@33.909,76.708 32.512,76.708 31.877,77.343 31.877,92.583 35.306,96.012 C26.1@36.703,96.012 41.021,96.012 41.148,96.139 v1(43.815,96.139) ; C1.1@34.798,114.808 34.798,113.411 32.907,111.52 U1.1@32.907,110.415 39.445,110.415 39.497,110.363 ; P2.1@36.195,122.555 36.195,119.253 ; v1(43.815,100.33) 43.815,101.854 ; R8.1@48.006,101.727 47.879,101.854 43.815,101.854 ; UART1.1@69.469,118.491 69.469,120.269 67.31,122.428 60.071,122.428 57.836,120.193 C29.2@57.836,119.621 57.836,118.288 55.88,116.332 53.467,116.332 50.178,119.621 C28.2@48.184,119.621 48.184,117.399 45.593,114.808 C2.1@39.497,114.808 ; C23.1@119.888,89.154 119.888,90.678 121.031,91.821 U8.29@121.031,99.809 ; R10.1@120.904,112.321 124.181,112.321 ; U8.28@124.181,104.111 124.181,112.321 ; P10.1@136.906,117.094 130.81,117.094 126.037,112.321 124.181,112.321 ; 30.734,119.253 36.195,119.253 ; 36.195,119.253 38.227,119.253 39.497,117.983 C2.1@39.497,114.808 ; 39.497,110.363 C2.1@39.497,114.808 ; 39.497,110.363 39.497,106.934 42.108,104.323 SW1.1@42.108,101.854 43.815,101.854
  Bottom Layer w0.3: v1(109.728,112.268) 109.474,112.268 109.601,112.141 v1(113.538,112.141)
  Bottom Layer w0.5: v1(43.815,96.139) v1(43.815,100.33)
IA: C7.2 P6.1 P11.1 U5.7 U6.10 | length 29
  Top Layer w0.3: P6.1@48.387,75.819 48.387,76.835 51.054,79.502 51.054,82.296 53.769,85.011 U6.10@55.138,85.011 ; P11.1@81.153,116.84 82.169,117.856 89.154,117.856 89.916,117.094 C7.2@91.186,117.094 91.44,116.84 U5.7@96.533,116.84
IB: C27.2 P6.2 P11.14 U6.11 U8.7@99.695,83.833 | length 38.6
  Top Layer w0.2: U6.11@55.117,84.49 U6.11@55.138,84.511 ; C27.2@98.933,80.391 C27.2@99.314,80.772
  Top Layer w0.3: P6.2@50.927,75.819 51.943,76.835 51.943,82.003 54.43,84.49 U6.11@55.117,84.49 ; P11.14@81.153,83.82 81.153,81.28 84.963,77.47 97.536,77.47 98.933,78.867 C27.2@98.933,80.391 ; C27.2@99.314,80.772 99.314,82.169 99.695,82.55 U8.7@99.695,83.833
MA+: MO2.1 U5.3 U5.4 | length 22.5
  Top Layer w0.381: MO2.1@92.583,102.616 95.377,102.616 98.806,106.045 98.806,116.459 100.457,118.11 U5.3@101.333,118.11 U5.4@101.333,119.38
MA-: MO2.2 U8.7@118.135,100.139 | length 26.2
  Top Layer w0.3: MO2.2@92.583,100.076 93.345,99.314 115.168,99.314 115.884,100.03 116.84,100.03 116.949,100.139 U8.7@118.135,100.139
MB+: MO2.3 U8.3@98.425,88.633 U8.4@97.155,88.633 | length 18.1
  Top Layer w0.3: MO2.3@92.583,97.536 90.805,97.536 89.789,96.52 89.789,91.44 92.596,88.633 U8.4@97.155,88.633 U8.3@98.425,88.633
MB-: MO2.4 U8.8@118.135,99.504 | length 27.7
  Top Layer w0.3: MO2.4@92.583,94.996 94.488,94.996 98.171,98.679 115.316,98.679 116.101,99.464 118.336,99.464 U8.8@118.389,99.517
MISO: P4.3 U6.16 | length 18.8
  Top Layer w0.3: P4.3@51.816,66.167 51.816,70.612 58.387,77.183 U6.16@58.387,82.263
MOSI: P4.4 U6.17 | length 18
  Top Layer w0.3: P4.4@54.356,66.167 54.356,71.755 58.887,76.286 U6.17@58.887,82.263
MOTOR_EN: P11.12 U6.26 | length 18.8
  Top Layer w0.3: U6.26@64.135,84.511 75.748,84.511 80.137,88.9 P11.12@81.153,88.9
MOTOR_ENa: P10.12 U8.17 | length 15.9
  Top Layer w0.3: U8.17@124.181,96.901 125.857,96.901 133.604,89.154 P10.12@136.906,89.154
MOTOR_RST: P11.13 U6.25 | length 18
  Top Layer w0.3: U6.25@64.135,84.011 77.534,84.011 79.883,86.36 P11.13@81.153,86.36
MOTOR_RSTa: P10.13 U8.16 | length 16.7
  Top Layer w0.3: U8.16@124.181,96.266 125.095,96.266 134.747,86.614 P10.13@136.906,86.614
NetC13_1: C13.1 U8.2@118.135,103.391 | length 4.7
  Top Layer w0.254: C13.1@113.919,104.14 115.57,104.14 116.319,103.391 U8.2@118.135,103.391 ; C13.1@114.046,103.48 C13.1@114.046,103.505 ; U8.2@118.313,103.48 U8.2@118.389,103.403
NetC13_2: C13.2 U8.1@118.135,104.051 | length 9.3
  Top Layer w0.3: C13.2@112.014,103.505 112.014,105.537 112.395,105.918 115.062,105.918 116.916,104.064 U8.1@118.389,104.064
NetC21_1: C21.1 R5.1 U8.3@118.135,102.756 | length 12.6
  Top Layer w0.3: C21.1@109.474,103.505 C21.1@109.601,103.378 109.601,102.87 110.109,102.362 116.332,102.362 116.738,102.768 U8.3@118.389,102.768
  Top Layer w0.5: C21.1@109.474,103.505 R5.1@109.474,106.299
NetR10_2: R10.2 U8.6@118.135,100.8 | length 11.1
  Top Layer w0.2: U8.6@118.135,100.8 118.213,100.878 119.184,100.878 119.432,101.126 119.432,102.873 119.761,103.202 119.761,107.315 120.904,108.458 R10.2@120.904,109.421
  Top Layer w0.3: R10.2@120.904,109.421 R10.2@121.412,108.913
NetR11_2: R11.2 U8.9 | length 37
  Top Layer w0.2: v1(101.6,92.71) 107.061,98.171 115.951,98.171 116.586,98.806 118.097,98.806 U8.9@118.135,98.844
  Top Layer w0.3: R11.2@114.173,89.535 114.173,91.186 v1(115.697,92.71)
  Bottom Layer w0.3: v1(101.6,92.71) v1(115.697,92.71)
NetR12_1: R12.1 R13.2 U8.12 U8.13 | length 37.6
  Top Layer w0.3: v1(113.411,95.758) 116.184,95.758 116.679,96.253 U8.13@118.135,96.253 ; U8.13@118.389,96.2 U8.12@118.389,96.901
  Top Layer w0.5: R13.2@112.014,119.253 115.621,119.253 115.875,119.507 R12.1@119.507,119.507
  Bottom Layer w0.5: v1(113.411,95.758) 115.189,97.536 v1(115.189,119.38)
NetU5_1: U5.1 U5.2 U8.5@118.135,101.435 | length 31.2
  Top Layer w0.2: 116.332,100.584 116.88,101.132 116.88,101.15 117.087,101.357 118.058,101.357 U8.5@118.135,101.435
  Top Layer w0.3: U5.2@101.333,116.84 101.46,115.57 108.966,115.57 ; 109.029,115.506 112.014,112.522 v1@112.014,107.95 ; v1(112.014,100.584) 116.332,100.584 ; U8.5@118.389,101.448 U8.5@118.443,101.501
  Bottom Layer w0.3: v1(112.014,100.584) v1(112.014,107.696)
NetU8_1: U8.1@100.965,88.633 U8.2@99.695,88.633 U8.10 | length 23.6
  Top Layer w0.3: U8.1@100.965,88.633 100.965,90.17 108.458,97.663 116.45,97.663 116.943,98.156 118.349,98.156 U8.10@118.389,98.196
  Top Layer w0.5: U8.2@99.695,88.633 U8.1@100.965,88.633
NFAULT: P11.11 U6.27 | length 20.3
  Top Layer w0.3: U6.27@64.135,85.011 74.724,85.011 79.629,89.916 79.629,90.932 80.137,91.44 P11.11@81.153,91.44
nFAULTaa: P10.11 U8.18 | length 15.2
  Top Layer w0.3: U8.18@124.181,97.561 126.721,97.561 132.588,91.694 P10.11@136.906,91.694
OSCIN1: C14.2 U6.5 Y1.2 | length 26.8
  Top Layer w0.3: Y1.2@41.275,79.426 41.275,82.804 45.982,87.511 U6.5@55.138,87.511
  Top Layer w0.5: C14.2@33.909,78.74 37.236,78.74 37.922,79.426 Y1.2@41.275,79.426
OSCIN2: C25.2 U6.3 Y2.1 | length 16.8
  Top Layer w0.3: C25.2@41.148,93.853 41.148,92.888 Y2.1@43.18,90.856 44.653,90.856 46.998,88.511 U6.3@55.138,88.511
OSCOUT1: C15.2 U6.6 Y1.1 | length 36.4
  Top Layer w0.3: Y1.1@41.275,69.926 43.891,69.926 44.196,70.231 44.196,84.074 47.133,87.011 U6.6@55.138,87.011
  Top Layer w0.5: C15.2@33.909,69.85 41.199,69.85 Y1.1@41.275,69.926
OSCOUT2: C26.2 U6.4 Y2.2 | length 31.3
  Top Layer w0.2: 35.814,93.98 C26.2@36.703,93.98 ; Y2.2@43.18,88.316 Y2.2@43.485,88.011
  Top Layer w0.3: 35.814,93.98 33.782,91.948 33.782,87.249 34.925,86.106 40.97,86.106 Y2.2@43.18,88.316 ; Y2.2@43.485,88.011 U6.4@55.138,88.011
PB0: P3.4 U6.18 | length 18.4
  Top Layer w0.3: U6.18@59.387,82.263 59.387,73.963 64.897,68.453 P3.4@64.897,66.167
PB1: P3.5 U6.19 | length 19.2
  Top Layer w0.3: U6.19@59.887,82.263 59.887,75.749 67.437,68.199 P3.5@67.437,66.167
PB10: P3.6 U6.21 | length 19.9
  Top Layer w0.3: U6.21@60.887,82.263 60.887,77.797 69.977,68.707 P3.6@69.977,66.167
PB11: P3.7 U6.22 | length 20.7
  Top Layer w0.3: U6.22@61.387,82.263 61.387,79.456 72.517,68.326 P3.7@72.517,66.167
PWM_CH1: P11.9 U6.29 | length 24
  Top Layer w0.3: U6.29@64.135,86.011 73.692,86.011 78.613,90.932 78.613,95.504 79.629,96.52 P11.9@81.153,96.52
PWM_CH1a: P10.9 U8.20 | length 13.6
  Top Layer w0.3: U8.20@124.181,98.857 128.473,98.857 130.556,96.774 P10.9@136.906,96.774
PWM_CH2: P11.8 U6.30 | length 26.2
  Top Layer w0.3: U6.30@64.135,86.511 72.795,86.511 77.216,90.932 77.216,97.79 78.486,99.06 P11.8@81.153,99.06
PWM_CH2a: P10.8 U8.21 | length 12.8
  Top Layer w0.3: U8.21@124.181,99.517 136.703,99.517 P10.8@136.906,99.314
PWM_CH3: P11.7 U6.31 | length 27.7
  Top Layer w0.2: U6.31@64.135,87.011 U6.31@64.156,87.032
  Top Layer w0.3: U6.31@64.156,87.032 71.919,87.032 76.327,91.44 76.327,99.314 78.613,101.6 P11.7@81.153,101.6
PWM_CH3a: P10.7 U8.22 | length 13.4
  Top Layer w0.3: U8.22@124.181,100.152 128.219,100.152 129.921,101.854 P10.7@136.906,101.854
PWM_CH4: P11.6 U6.32 | length 29.3
  Top Layer w0.3: U6.32@64.135,87.511 71.128,87.511 74.93,91.313 74.93,100.584 78.486,104.14 P11.6@81.153,104.14
PWM_CH4a: P10.6 U8.23 | length 14.2
  Top Layer w0.3: U8.23@124.181,100.813 127.483,100.813 131.064,104.394 P10.6@136.906,104.394
RST: C10.2 R3.1 SW1.2 U6.7 | length 86.5
  Top Layer w0.2: U6.7@55.138,86.511 U6.7@55.159,86.532
  Top Layer w0.3: C10.2@47.879,84.582 47.879,85.852 48.538,86.511 U6.7@55.138,86.511
  Top Layer w0.5: SW1.2@35.108,101.854 30.48,101.854 27.559,98.933 R3.1@27.559,96.012 29.337,96.012 29.845,95.504 29.845,68.961 34.29,64.516 41.402,64.516 46.101,69.215 46.101,84.201 46.482,84.582 C10.2@47.879,84.582
RX: U6.43 UART1.3 | length 29.3
  Top Layer w0.3: U6.43@59.379,91.259 59.379,108.655 64.389,113.665 UART1.3@64.389,118.491
SWCLK: P1.3 U6.37 | length 13.8
  Top Layer w0.3: U6.37@62.387,91.259 62.387,95.788 64.262,97.663 67.056,97.663 67.945,97.663 P1.3@70.866,97.663
SWDIO: P1.2 U6.34 | length 16.5
  Top Layer w0.3: U6.34@64.135,88.511 71.112,88.511 73.66,91.059 73.66,93.599 72.136,95.123 P1.2@70.866,95.123
TX: U6.42 UART1.2 | length 30.2
  Top Layer w0.3: U6.42@59.883,91.259 59.883,107.635 60.071,107.823 66.929,114.681 UART1.2@66.929,118.491
V3P3OUT: C23.2 R12.2 U8.15 | length 86.6
  Top Layer w0.35: R12.2@121.539,119.507 123.444,121.412 138.303,121.412 141.351,118.364 141.351,84.328 138.938,81.915 131.445,81.915 124.206,89.154 C23.2@121.92,89.154
  Top Layer w0.5: C23.2@121.92,89.154 121.92,90.856 124.181,93.116 U8.15@124.181,95.504
VBAT: C1.2 C2.2 C6.2 C11.2 C24.2 P1.1 R3.2 U1.2 U1.4 U5.8 U6.1 U6.9 U6.24 U6.36 U6.48 U8.8@100.965,83.833 | length 243.3
  Top Layer w0.2: U6.9@55.117,85.49 U6.9@55.138,85.511 ; U6.24@62.387,82.263 62.387,88.676 63.222,89.511 U6.36@64.135,89.511 ; v1(84.836,90.17) 84.836,90.932 ; U8.8@100.965,83.833 105.55,83.833 107.569,85.852 C11.2@107.569,87.63
  Top Layer w0.3: v1(49.276,79.629) 49.276,81.661 53.105,85.49 U6.9@55.117,85.49 ; U6.1@55.138,89.511 52.348,89.511 v1(49.403,92.456) 50.165,93.218 56.261,93.218 56.883,92.596 U6.48@56.883,91.259 ; U6.24@62.387,82.263 62.387,81.377 62.865,80.899 73.279,80.899 73.787,80.391 C24.2@73.787,78.867 75.438,78.867 78.486,75.819 98.933,75.819 100.965,77.851 U8.8@100.965,83.833 ; U6.36@64.135,89.511 66.016,89.511 69.088,92.583 P1.1@70.866,92.583 ; v1(84.836,90.17) 84.836,107.442 92.964,115.57 U5.8@96.533,115.57
  Top Layer w0.5: R3.2@27.559,93.98 25.527,93.98 25.273,94.234 25.273,101.04 28.448,104.215 U1.4@30.607,104.215 ; C2.2@37.465,114.808 37.465,116.205 36.576,117.094 33.782,117.094 32.766,116.078 C1.2@32.766,114.808 32.766,113.792 31.598,112.624 31.471,112.624 30.607,111.76 U1.2@30.607,110.415 U1.4@30.607,104.215 ; v1(49.403,92.456) 48.133,93.726 C6.2@48.133,94.869 44.577,98.425 41.402,98.425 35.612,104.215 U1.4@30.607,104.215
  Bottom Layer w0.2: v1(49.276,79.629) 49.276,92.329 v1(49.403,92.456) 64.516,92.456 v1(66.675,90.297) 66.802,90.17 v1(84.836,90.17)
VCC_MO: C12.2 C21.2 C22.2 C28.1 C29.1 P2.2 R5.2 U8.4@118.135,102.095 U8.11 | length 143.4
  Top Layer w0.2: R5.2@107.442,106.299 R5.2@107.569,106.172
  Top Layer w0.3: R5.2@107.442,106.299 R5.2@107.569,106.426 ; C21.2@107.569,103.378 107.569,102.362 108.204,101.727 116.713,101.727 117.094,102.108 U8.4@118.389,102.108 ; v1@108.585,95.758 v1(108.585,95.504) 109.982,96.901 116.472,96.901 117.066,97.495 118.323,97.495 U8.11@118.389,97.561
  Top Layer w0.5: P2.2@38.735,122.555 41.872,122.555 C28.1@44.78,119.647 44.78,121.996 45.466,122.682 53.34,122.682 54.432,121.59 C29.1@54.432,120.472 ; C29.1@54.432,119.647 C29.1@54.432,120.472 ; v1(101.727,104.14) 103.378,105.791 C22.2@103.378,109.347 C12.2@107.569,109.347 R5.2@107.569,106.426 ; v1@101.79,124.333 58.293,124.333 C29.1@54.432,120.472 ; R5.2@107.569,106.172 C21.2@107.569,103.378 105.664,103.378 105.029,102.743 105.029,101.219 105.791,100.457 v1(107.95,100.457)
  Bottom Layer w0.3: v1(107.95,100.457) 108.204,100.457 108.585,100.076 v1(108.585,95.504)
  Bottom Layer w0.5: v1(101.727,104.14) 101.727,124.333 v1(101.79,124.396)